# Altium PCB Lite Carrier for Mu.PcbDoc (part 2 of 15)
Units mm, origin at the board's own origin, x right, y up, seen from the top; angles counter-clockwise.
Board outline 146 x 102 mm, 20 copper layers (F.Cu, F.Mask, B.Cu, B.Mask, In1.Cu, F.SilkS, In2.Cu, B.SilkS, F.Adhes, B.Adhes, F.Paste, B.Paste, Dwgs.User, Cmts.User, Eco1.User, Eco2.User, Edge.Cuts, Margin, B.CrtYd, F.CrtYd); 254 components, 382 nets, 1258 pads, 1020 vias.
Unrouted connection lines stored in the file: 113.
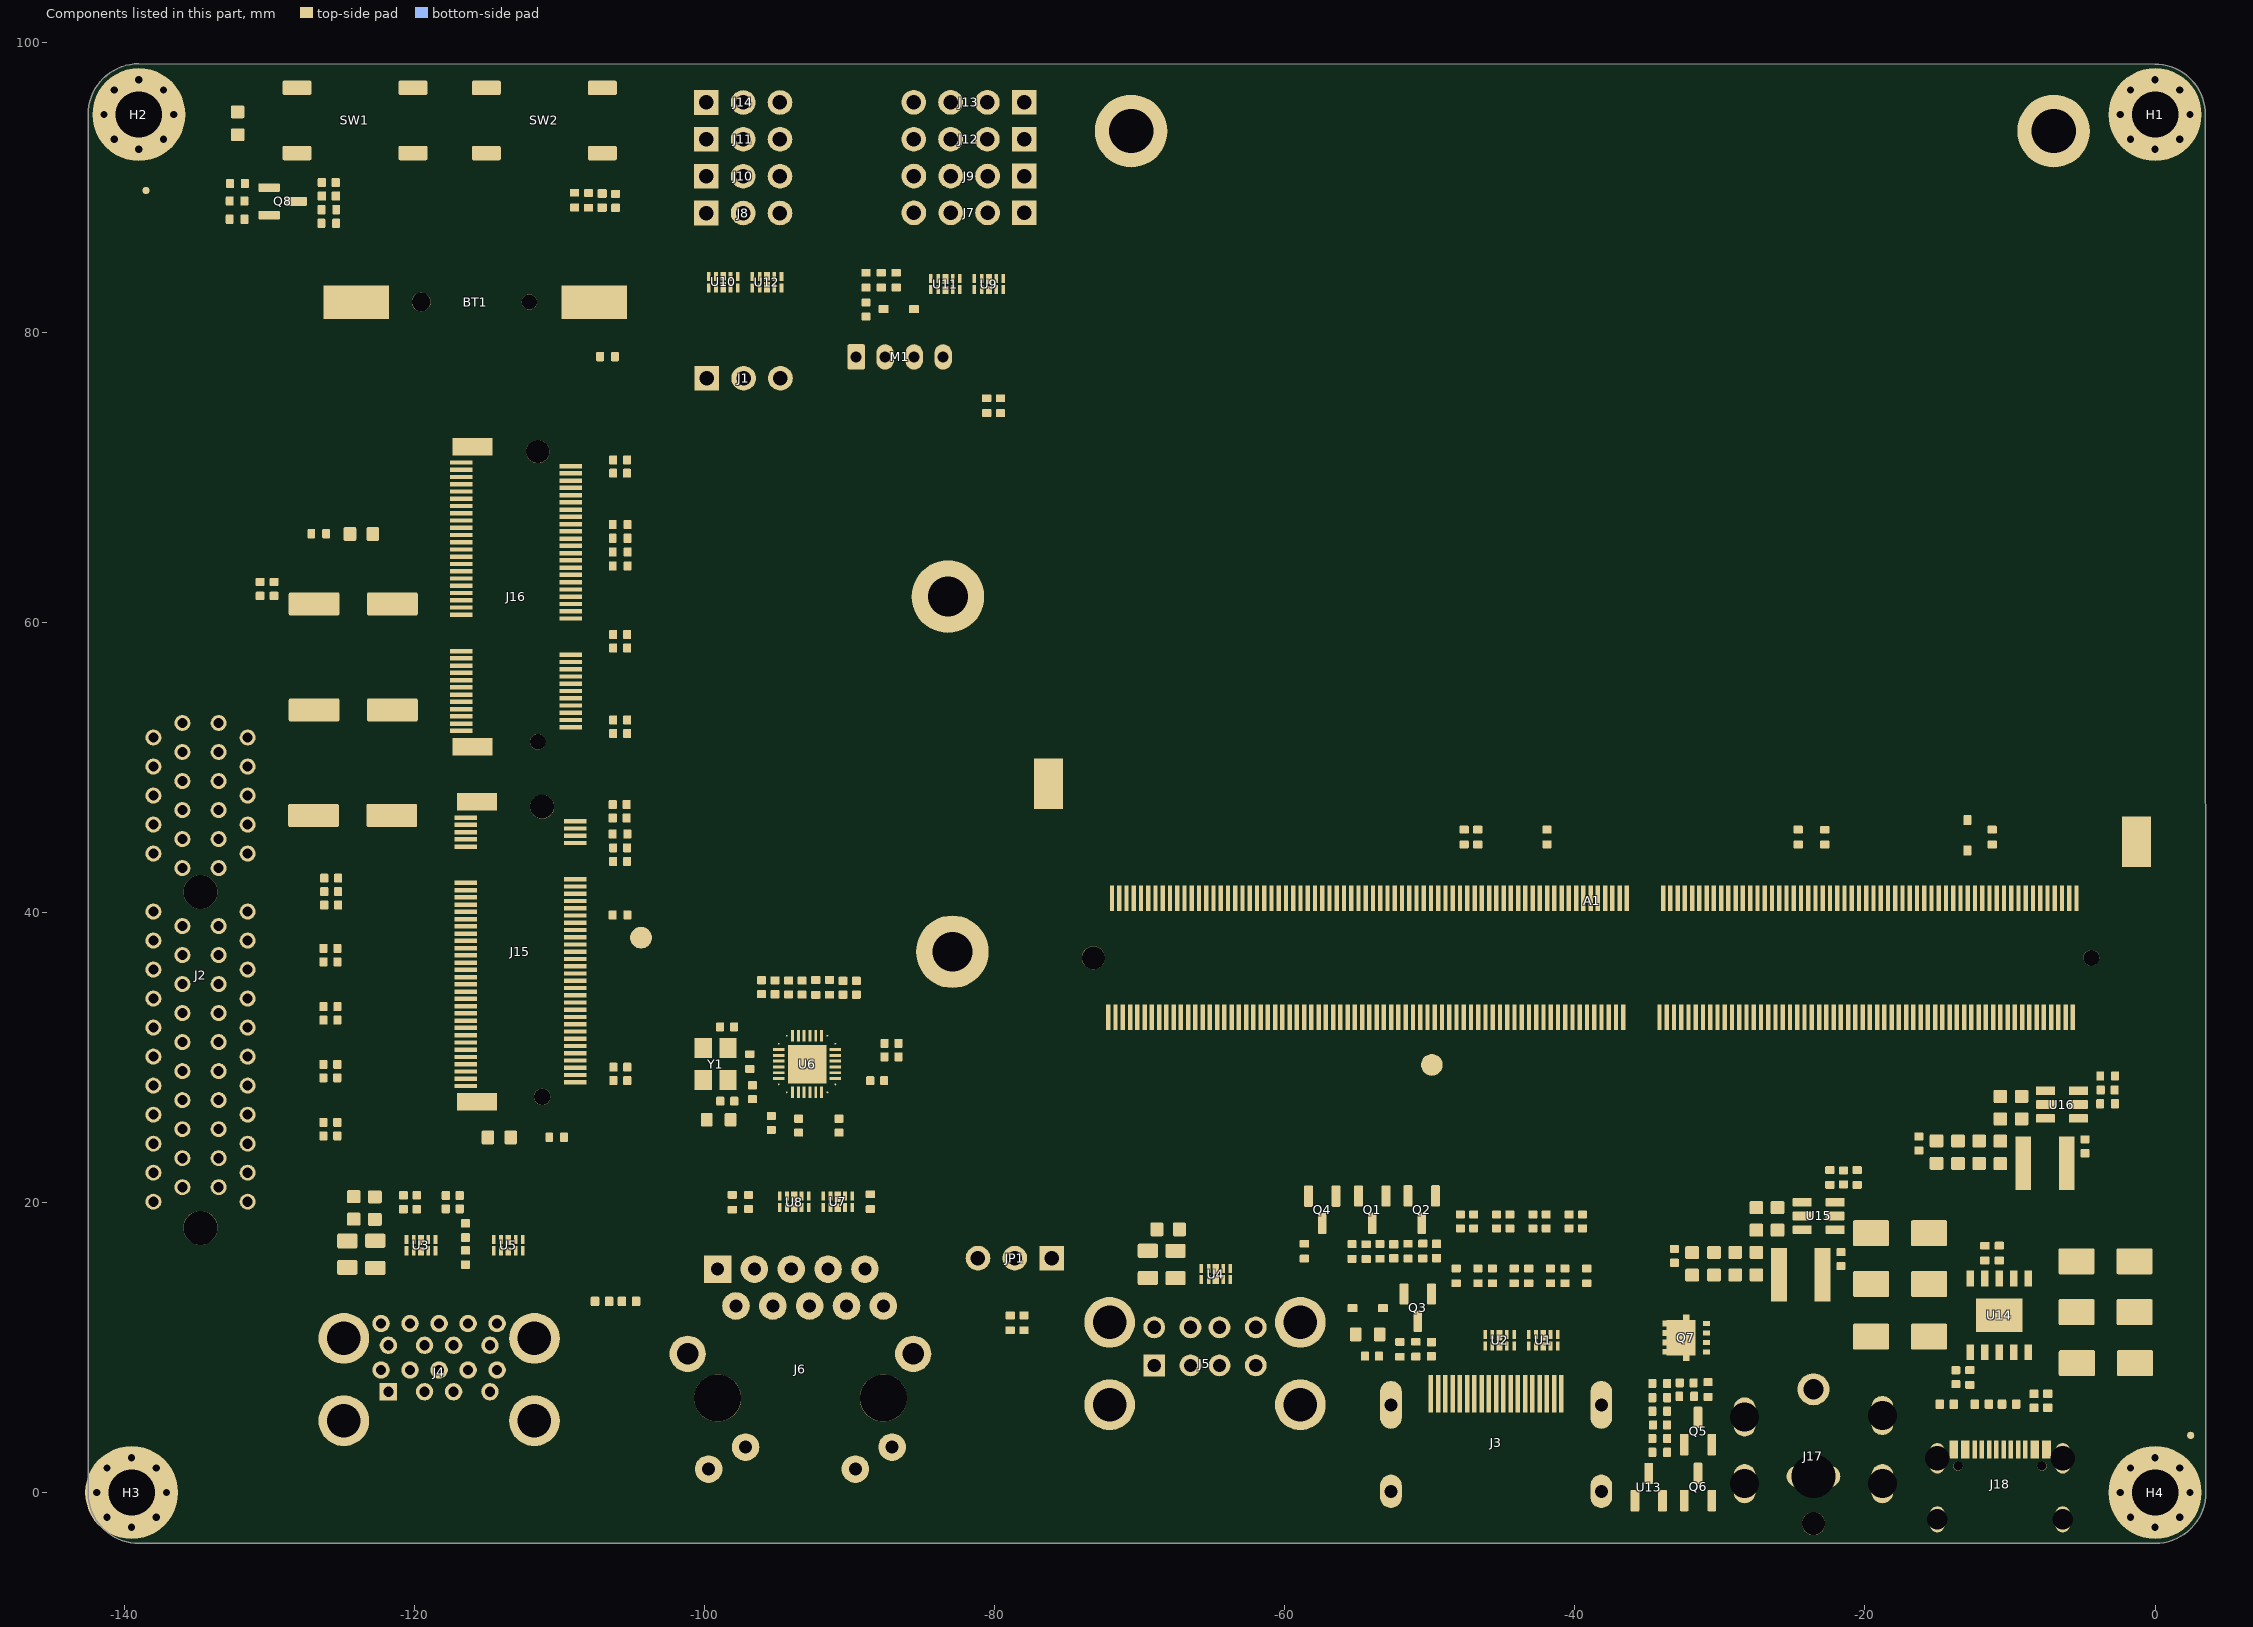
[diagram p13: the components of this part, seen from the top]

## Design rules (kind name [scope] priority, off if disabled: settings) (continued)
PolygonConnect Polygon_B.Cu-VDC_ConnectDirect [IsNamedPolygon('B.Cu-VDC')] p201: connectstyle=Direct reliefconductorwidth=0.254 reliefentries=4 polygonreliefangle="90 Angle" airgapwidth=0.254
PolygonConnect Polygon_B.Cu-+3V3-2_ConnectDirect [IsNamedPolygon('B.Cu-+3V3-2')] p202: connectstyle=Direct reliefconductorwidth=0.254 reliefentries=4 polygonreliefangle="90 Angle" airgapwidth=0.254
PolygonConnect Polygon_B.Cu-+3V3-1_ConnectDirect [IsNamedPolygon('B.Cu-+3V3-1')] p203: connectstyle=Direct reliefconductorwidth=0.254 reliefentries=4 polygonreliefangle="90 Angle" airgapwidth=0.254
PolygonConnect Polygon_B.Cu-/PSU/PWR_EN_ConnectDirect [IsNamedPolygon('B.Cu-/PSU/PWR_EN')] p204: connectstyle=Direct reliefconductorwidth=0.254 reliefentries=4 polygonreliefangle="90 Angle" airgapwidth=0.254
PolygonConnect "Polygon_B.Cu-/LattePanda Module/HSIO_10_RX+_ConnectDirect" [IsNamedPolygon('B.Cu-/LattePanda Module/HSIO_10_RX+')] p205: connectstyle=Direct reliefconductorwidth=0.254 reliefentries=4 polygonreliefangle="90 Angle" airgapwidth=0.254
PolygonConnect "Polygon_B.Cu-/LattePanda Module/HSIO_3_TX+-1_ConnectDirect" [IsNamedPolygon('B.Cu-/LattePanda Module/HSIO_3_TX+-1')] p206: connectstyle=Direct reliefconductorwidth=0.254 reliefentries=4 polygonreliefangle="90 Angle" airgapwidth=0.254
PolygonConnect "Polygon_B.Cu-/LattePanda Module/HSIO_3_TX+_ConnectDirect" [IsNamedPolygon('B.Cu-/LattePanda Module/HSIO_3_TX+')] p207: connectstyle=Direct reliefconductorwidth=0.254 reliefentries=4 polygonreliefangle="90 Angle" airgapwidth=0.254
PolygonConnect Polygon_B.Cu-/USB2.0&USB3.0/CON_USB3_SSRX_P_ConnectDirect [IsNamedPolygon('B.Cu-/USB2.0&USB3.0/CON_USB3_SSRX_P')] p208: connectstyle=Direct reliefconductorwidth=0.254 reliefentries=4 polygonreliefangle="90 Angle" airgapwidth=0.254
PolygonConnect Polygon_B.Cu-/~{WAKE}_ConnectDirect [IsNamedPolygon('B.Cu-/~{WAKE}')] p209: connectstyle=Direct reliefconductorwidth=0.254 reliefentries=4 polygonreliefangle="90 Angle" airgapwidth=0.254
PolygonConnect "Polygon_B.Cu-/LattePanda Module/REFCLK0-_ConnectDirect" [IsNamedPolygon('B.Cu-/LattePanda Module/REFCLK0-')] p210: connectstyle=Direct reliefconductorwidth=0.254 reliefentries=4 polygonreliefangle="90 Angle" airgapwidth=0.254
PolygonConnect "Polygon_B.Cu-/Gigabit Ethernet/GbE_PCIe_RX+-1_ConnectDirect" [IsNamedPolygon('B.Cu-/Gigabit Ethernet/GbE_PCIe_RX+-1')] p211: connectstyle=Direct reliefconductorwidth=0.254 reliefentries=4 polygonreliefangle="90 Angle" airgapwidth=0.254
PolygonConnect "Polygon_B.Cu-/LattePanda Module/HSIO_10_TX-_ConnectDirect" [IsNamedPolygon('B.Cu-/LattePanda Module/HSIO_10_TX-')] p212: connectstyle=Direct reliefconductorwidth=0.254 reliefentries=4 polygonreliefangle="90 Angle" airgapwidth=0.254
PolygonConnect "Polygon_B.Cu-/LattePanda Module/HSIO_8_TX--1_ConnectDirect" [IsNamedPolygon('B.Cu-/LattePanda Module/HSIO_8_TX--1')] p213: connectstyle=Direct reliefconductorwidth=0.254 reliefentries=4 polygonreliefangle="90 Angle" airgapwidth=0.254
PolygonConnect Polygon_B.Cu-/USB2.0&USB3.0/CON_USB3_SSTX_P_ConnectDirect [IsNamedPolygon('B.Cu-/USB2.0&USB3.0/CON_USB3_SSTX_P')] p214: connectstyle=Direct reliefconductorwidth=0.254 reliefentries=4 polygonreliefangle="90 Angle" airgapwidth=0.254
PolygonConnect "Polygon_B.Cu-/LattePanda Module/HSIO_8_TX+_ConnectDirect" [IsNamedPolygon('B.Cu-/LattePanda Module/HSIO_8_TX+')] p215: connectstyle=Direct reliefconductorwidth=0.254 reliefentries=4 polygonreliefangle="90 Angle" airgapwidth=0.254
PolygonConnect "Polygon_B.Cu-/LattePanda Module/HSIO_8_RX+_ConnectDirect" [IsNamedPolygon('B.Cu-/LattePanda Module/HSIO_8_RX+')] p216: connectstyle=Direct reliefconductorwidth=0.254 reliefentries=4 polygonreliefangle="90 Angle" airgapwidth=0.254
PolygonConnect "Polygon_B.Cu-/LattePanda Module/REFCLK2+_ConnectDirect" [IsNamedPolygon('B.Cu-/LattePanda Module/REFCLK2+')] p217: connectstyle=Direct reliefconductorwidth=0.254 reliefentries=4 polygonreliefangle="90 Angle" airgapwidth=0.254
PolygonConnect "Polygon_B.Cu-/LattePanda Module/HSIO_10_TX+-1_ConnectDirect" [IsNamedPolygon('B.Cu-/LattePanda Module/HSIO_10_TX+-1')] p218: connectstyle=Direct reliefconductorwidth=0.254 reliefentries=4 polygonreliefangle="90 Angle" airgapwidth=0.254
PolygonConnect "Polygon_B.Cu-/LattePanda Module/HSIO_2_RX-_ConnectDirect" [IsNamedPolygon('B.Cu-/LattePanda Module/HSIO_2_RX-')] p219: connectstyle=Direct reliefconductorwidth=0.254 reliefentries=4 polygonreliefangle="90 Angle" airgapwidth=0.254
PolygonConnect "Polygon_B.Cu-/LattePanda Module/HSIO_3_TX-_ConnectDirect" [IsNamedPolygon('B.Cu-/LattePanda Module/HSIO_3_TX-')] p220: connectstyle=Direct reliefconductorwidth=0.254 reliefentries=4 polygonreliefangle="90 Angle" airgapwidth=0.254
PolygonConnect "Polygon_B.Cu-/LattePanda Module/USB_2_P7-_ConnectDirect" [IsNamedPolygon('B.Cu-/LattePanda Module/USB_2_P7-')] p221: connectstyle=Direct reliefconductorwidth=0.254 reliefentries=4 polygonreliefangle="90 Angle" airgapwidth=0.254
PolygonConnect Polygon_B.Cu-/USB2.0&USB3.0/CON_USB3_D_P-1_ConnectDirect [IsNamedPolygon('B.Cu-/USB2.0&USB3.0/CON_USB3_D_P-1')] p222: connectstyle=Direct reliefconductorwidth=0.254 reliefentries=4 polygonreliefangle="90 Angle" airgapwidth=0.254
PolygonConnect Polygon_B.Cu-Net-(A1-~{BIOS_SEL})_ConnectDirect [IsNamedPolygon('B.Cu-Net-(A1-~{BIOS_SEL})')] p223: connectstyle=Direct reliefconductorwidth=0.254 reliefentries=4 polygonreliefangle="90 Angle" airgapwidth=0.254
PolygonConnect Polygon_B.Cu-Net-(A1-SIO_UART_RX)-1_ConnectDirect [IsNamedPolygon('B.Cu-Net-(A1-SIO_UART_RX)-1')] p224: connectstyle=Direct reliefconductorwidth=0.254 reliefentries=4 polygonreliefangle="90 Angle" airgapwidth=0.254
PolygonConnect "Polygon_B.Cu-/LattePanda Module/HSIO_9_RX-_ConnectDirect" [IsNamedPolygon('B.Cu-/LattePanda Module/HSIO_9_RX-')] p225: connectstyle=Direct reliefconductorwidth=0.254 reliefentries=4 polygonreliefangle="90 Angle" airgapwidth=0.254
PolygonConnect "Polygon_B.Cu-/LattePanda Module/HSIO_8_TX-_ConnectDirect" [IsNamedPolygon('B.Cu-/LattePanda Module/HSIO_8_TX-')] p226: connectstyle=Direct reliefconductorwidth=0.254 reliefentries=4 polygonreliefangle="90 Angle" airgapwidth=0.254
PolygonConnect Polygon_B.Cu-/GPIO/I2C2_SCL_ConnectDirect [IsNamedPolygon('B.Cu-/GPIO/I2C2_SCL')] p227: connectstyle=Direct reliefconductorwidth=0.254 reliefentries=4 polygonreliefangle="90 Angle" airgapwidth=0.254
PolygonConnect Polygon_B.Cu-+3V3_ConnectDirect [IsNamedPolygon('B.Cu-+3V3')] p228: connectstyle=Direct reliefconductorwidth=0.254 reliefentries=4 polygonreliefangle="90 Angle" airgapwidth=0.254
PolygonConnect Polygon_B.Cu-/USB2.0&USB3.0/CON_USB3_SSTX_N_ConnectDirect [IsNamedPolygon('B.Cu-/USB2.0&USB3.0/CON_USB3_SSTX_N')] p229: connectstyle=Direct reliefconductorwidth=0.254 reliefentries=4 polygonreliefangle="90 Angle" airgapwidth=0.254
PolygonConnect "Polygon_B.Cu-/LattePanda Module/HSIO_1_TX+_ConnectDirect" [IsNamedPolygon('B.Cu-/LattePanda Module/HSIO_1_TX+')] p230: connectstyle=Direct reliefconductorwidth=0.254 reliefentries=4 polygonreliefangle="90 Angle" airgapwidth=0.254
PolygonConnect Polygon_B.Cu-/USB2.0&USB3.0/CON_USB3_D_P_ConnectDirect [IsNamedPolygon('B.Cu-/USB2.0&USB3.0/CON_USB3_D_P')] p231: connectstyle=Direct reliefconductorwidth=0.254 reliefentries=4 polygonreliefangle="90 Angle" airgapwidth=0.254
PolygonConnect Polygon_B.Cu-/HDMI/DDI_B_DDC_SDA_ConnectDirect [IsNamedPolygon('B.Cu-/HDMI/DDI_B_DDC_SDA')] p232: connectstyle=Direct reliefconductorwidth=0.254 reliefentries=4 polygonreliefangle="90 Angle" airgapwidth=0.254
PolygonConnect Polygon_B.Cu-/PSU/PWR_C_D-_ConnectDirect [IsNamedPolygon('B.Cu-/PSU/PWR_C_D-')] p233: connectstyle=Direct reliefconductorwidth=0.254 reliefentries=4 polygonreliefangle="90 Angle" airgapwidth=0.254
PolygonConnect "Polygon_B.Cu-/LattePanda Module/HSIO_10_TX+_ConnectDirect" [IsNamedPolygon('B.Cu-/LattePanda Module/HSIO_10_TX+')] p234: connectstyle=Direct reliefconductorwidth=0.254 reliefentries=4 polygonreliefangle="90 Angle" airgapwidth=0.254
PolygonConnect "Polygon_B.Cu-/Gigabit Ethernet/GbE_PCIe_RX+_ConnectDirect" [IsNamedPolygon('B.Cu-/Gigabit Ethernet/GbE_PCIe_RX+')] p235: connectstyle=Direct reliefconductorwidth=0.254 reliefentries=4 polygonreliefangle="90 Angle" airgapwidth=0.254
PolygonConnect "Polygon_B.Cu-/LattePanda Module/HSIO_9_TX+_ConnectDirect" [IsNamedPolygon('B.Cu-/LattePanda Module/HSIO_9_TX+')] p236: connectstyle=Direct reliefconductorwidth=0.254 reliefentries=4 polygonreliefangle="90 Angle" airgapwidth=0.254
PolygonConnect Polygon_B.Cu-Net-(JP1-C)_ConnectDirect [IsNamedPolygon('B.Cu-Net-(JP1-C)')] p237: connectstyle=Direct reliefconductorwidth=0.254 reliefentries=4 polygonreliefangle="90 Angle" airgapwidth=0.254
PolygonConnect "Polygon_B.Cu-/LattePanda Module/HSIO_8_RX-_ConnectDirect" [IsNamedPolygon('B.Cu-/LattePanda Module/HSIO_8_RX-')] p238: connectstyle=Direct reliefconductorwidth=0.254 reliefentries=4 polygonreliefangle="90 Angle" airgapwidth=0.254
PolygonConnect "Polygon_B.Cu-/LattePanda Module/HSIO_3_RX-_ConnectDirect" [IsNamedPolygon('B.Cu-/LattePanda Module/HSIO_3_RX-')] p239: connectstyle=Direct reliefconductorwidth=0.254 reliefentries=4 polygonreliefangle="90 Angle" airgapwidth=0.254
PolygonConnect Polygon_B.Cu-Net-(A1-SIO_UART_RX)_ConnectDirect [IsNamedPolygon('B.Cu-Net-(A1-SIO_UART_RX)')] p240: connectstyle=Direct reliefconductorwidth=0.254 reliefentries=4 polygonreliefangle="90 Angle" airgapwidth=0.254
PolygonConnect Polygon_B.Cu-/USB2.0&USB3.0/CON_USB3_D_N_ConnectDirect [IsNamedPolygon('B.Cu-/USB2.0&USB3.0/CON_USB3_D_N')] p241: connectstyle=Direct reliefconductorwidth=0.254 reliefentries=4 polygonreliefangle="90 Angle" airgapwidth=0.254
PolygonConnect Polygon_B.Cu-/GPIO/I2C3_SCL_ConnectDirect [IsNamedPolygon('B.Cu-/GPIO/I2C3_SCL')] p242: connectstyle=Direct reliefconductorwidth=0.254 reliefentries=4 polygonreliefangle="90 Angle" airgapwidth=0.254
PolygonConnect "Polygon_B.Cu-/LattePanda Module/HSIO_0_TX+_ConnectDirect" [IsNamedPolygon('B.Cu-/LattePanda Module/HSIO_0_TX+')] p243: connectstyle=Direct reliefconductorwidth=0.254 reliefentries=4 polygonreliefangle="90 Angle" airgapwidth=0.254
PolygonConnect Polygon_B.Cu-/PSU/CC1_ConnectDirect [IsNamedPolygon('B.Cu-/PSU/CC1')] p244: connectstyle=Direct reliefconductorwidth=0.254 reliefentries=4 polygonreliefangle="90 Angle" airgapwidth=0.254
PolygonConnect Polygon_B.Cu-/PSU/CC2_ConnectDirect [IsNamedPolygon('B.Cu-/PSU/CC2')] p245: connectstyle=Direct reliefconductorwidth=0.254 reliefentries=4 polygonreliefangle="90 Angle" airgapwidth=0.254
PolygonConnect Polygon_B.Cu-Net-(A1-SIO_UART_TX)_ConnectDirect [IsNamedPolygon('B.Cu-Net-(A1-SIO_UART_TX)')] p246: connectstyle=Direct reliefconductorwidth=0.254 reliefentries=4 polygonreliefangle="90 Angle" airgapwidth=0.254
PolygonConnect "Polygon_B.Cu-/LattePanda Module/HSIO_2_TX+_ConnectDirect" [IsNamedPolygon('B.Cu-/LattePanda Module/HSIO_2_TX+')] p247: connectstyle=Direct reliefconductorwidth=0.254 reliefentries=4 polygonreliefangle="90 Angle" airgapwidth=0.254
PolygonConnect "Polygon_B.Cu-/LattePanda Module/HSIO_11_RX+_ConnectDirect" [IsNamedPolygon('B.Cu-/LattePanda Module/HSIO_11_RX+')] p248: connectstyle=Direct reliefconductorwidth=0.254 reliefentries=4 polygonreliefangle="90 Angle" airgapwidth=0.254
PolygonConnect Polygon_B.Cu-/Fan_Temp/FAN_1_PWM_ConnectDirect [IsNamedPolygon('B.Cu-/Fan_Temp/FAN_1_PWM')] p249: connectstyle=Direct reliefconductorwidth=0.254 reliefentries=4 polygonreliefangle="90 Angle" airgapwidth=0.254
PolygonConnect Polygon_In2.Cu-+3V3-1_ConnectDirect [IsNamedPolygon('In2.Cu-+3V3-1')] p250: connectstyle=Direct reliefconductorwidth=0.254 reliefentries=4 polygonreliefangle="90 Angle" airgapwidth=0.254
PolygonConnect Polygon_F.Cu-+3V3-79_ConnectDirect [IsNamedPolygon('F.Cu-+3V3-79')] p251: connectstyle=Direct reliefconductorwidth=0.254 reliefentries=4 polygonreliefangle="90 Angle" airgapwidth=0.254
PolygonConnect Polygon_In2.Cu-+3V3_ConnectDirect [IsNamedPolygon('In2.Cu-+3V3')] p252: connectstyle=Direct reliefconductorwidth=0.254 reliefentries=4 polygonreliefangle="90 Angle" airgapwidth=0.254
PolygonConnect Polygon_F.Cu-+3V3-78_ConnectDirect [IsNamedPolygon('F.Cu-+3V3-78')] p253: connectstyle=Direct reliefconductorwidth=0.254 reliefentries=4 polygonreliefangle="90 Angle" airgapwidth=0.254
PolygonConnect Polygon_B.Cu-+12VA_ConnectDirect [IsNamedPolygon('B.Cu-+12VA')] p254: connectstyle=Direct reliefconductorwidth=0.254 reliefentries=4 polygonreliefangle="90 Angle" airgapwidth=0.254
PolygonConnect Polygon_F.Cu-+12VA-2_ConnectDirect [IsNamedPolygon('F.Cu-+12VA-2')] p255: connectstyle=Direct reliefconductorwidth=0.254 reliefentries=4 polygonreliefangle="90 Angle" airgapwidth=0.254
PolygonConnect Polygon_B.Cu-GND-1_ConnectDirect [IsNamedPolygon('B.Cu-GND-1') vs IsVia or IsSMTPin] p256: connectstyle=Direct reliefconductorwidth=0.254 reliefentries=4 polygonreliefangle="90 Angle" airgapwidth=0.254
PolygonConnect Polygon_B.Cu-GND-1_ConnectRelief45 [IsNamedPolygon('B.Cu-GND-1') vs IsThruPin and (PadShape_AllLayers = 'Round')] p257: connectstyle=Relief reliefconductorwidth=0.3 reliefentries=4 polygonreliefangle="45 Angle" airgapwidth=0.3
PolygonConnect Polygon_B.Cu-GND-1_ConnectRelief90 [IsNamedPolygon('B.Cu-GND-1') vs IsThruPin and (PadShape_AllLayers <> 'Round')] p258: connectstyle=Relief reliefconductorwidth=0.3 reliefentries=4 polygonreliefangle="90 Angle" airgapwidth=0.3
PolygonConnect Polygon_F.Cu-GND-192_ConnectDirect [IsNamedPolygon('F.Cu-GND-192') vs IsVia or IsSMTPin] p259: connectstyle=Direct reliefconductorwidth=0.254 reliefentries=4 polygonreliefangle="90 Angle" airgapwidth=0.254
PolygonConnect Polygon_F.Cu-GND-192_ConnectRelief45 [IsNamedPolygon('F.Cu-GND-192') vs IsThruPin and (PadShape_AllLayers = 'Round')] p260: connectstyle=Relief reliefconductorwidth=0.3 reliefentries=4 polygonreliefangle="45 Angle" airgapwidth=0.3
PolygonConnect Polygon_F.Cu-GND-192_ConnectRelief90 [IsNamedPolygon('F.Cu-GND-192') vs IsThruPin and (PadShape_AllLayers <> 'Round')] p261: connectstyle=Relief reliefconductorwidth=0.3 reliefentries=4 polygonreliefangle="90 Angle" airgapwidth=0.3
PolygonConnect Polygon_B.Cu-+5V_ConnectDirect [IsNamedPolygon('B.Cu-+5V')] p262: connectstyle=Direct reliefconductorwidth=0.254 reliefentries=4 polygonreliefangle="90 Angle" airgapwidth=0.254
PolygonConnect Polygon_F.Cu-+5V-13_ConnectDirect [IsNamedPolygon('F.Cu-+5V-13')] p263: connectstyle=Direct reliefconductorwidth=0.254 reliefentries=4 polygonreliefangle="90 Angle" airgapwidth=0.254
PolygonConnect Polygon_B.Cu-GND_ConnectDirect [IsNamedPolygon('B.Cu-GND') vs IsVia or IsSMTPin] p264: connectstyle=Direct reliefconductorwidth=0.254 reliefentries=4 polygonreliefangle="90 Angle" airgapwidth=0.254
PolygonConnect Polygon_B.Cu-GND_ConnectRelief45 [IsNamedPolygon('B.Cu-GND') vs IsThruPin and (PadShape_AllLayers = 'Round')] p265: connectstyle=Relief reliefconductorwidth=0.5 reliefentries=4 polygonreliefangle="45 Angle" airgapwidth=0.5
PolygonConnect Polygon_B.Cu-GND_ConnectRelief90 [IsNamedPolygon('B.Cu-GND') vs IsThruPin and (PadShape_AllLayers <> 'Round')] p266: connectstyle=Relief reliefconductorwidth=0.5 reliefentries=4 polygonreliefangle="90 Angle" airgapwidth=0.5
PolygonConnect Polygon_F.Cu-GND-191_ConnectDirect [IsNamedPolygon('F.Cu-GND-191') vs IsVia or IsSMTPin] p267: connectstyle=Direct reliefconductorwidth=0.254 reliefentries=4 polygonreliefangle="90 Angle" airgapwidth=0.254
PolygonConnect Polygon_F.Cu-GND-191_ConnectRelief45 [IsNamedPolygon('F.Cu-GND-191') vs IsThruPin and (PadShape_AllLayers = 'Round')] p268: connectstyle=Relief reliefconductorwidth=0.5 reliefentries=4 polygonreliefangle="45 Angle" airgapwidth=0.5
PolygonConnect Polygon_F.Cu-GND-191_ConnectRelief90 [IsNamedPolygon('F.Cu-GND-191') vs IsThruPin and (PadShape_AllLayers <> 'Round')] p269: connectstyle=Relief reliefconductorwidth=0.5 reliefentries=4 polygonreliefangle="90 Angle" airgapwidth=0.5
PolygonConnect Polygon_F.Cu-+3V3-77_ConnectDirect [IsNamedPolygon('F.Cu-+3V3-77')] p270: connectstyle=Direct reliefconductorwidth=0.254 reliefentries=4 polygonreliefangle="90 Angle" airgapwidth=0.254
PolygonConnect Polygon_F.Cu-Net-(JP1-C)-1_ConnectDirect [IsNamedPolygon('F.Cu-Net-(JP1-C)-1')] p271: connectstyle=Direct reliefconductorwidth=0.254 reliefentries=4 polygonreliefangle="90 Angle" airgapwidth=0.254
PolygonConnect Polygon_F.Cu-+3V3-76_ConnectDirect [IsNamedPolygon('F.Cu-+3V3-76')] p272: connectstyle=Direct reliefconductorwidth=0.254 reliefentries=4 polygonreliefangle="90 Angle" airgapwidth=0.254
PolygonConnect Polygon_F.Cu-Net-(Q7-G)-7_ConnectDirect [IsNamedPolygon('F.Cu-Net-(Q7-G)-7')] p273: connectstyle=Direct reliefconductorwidth=0.254 reliefentries=4 polygonreliefangle="90 Angle" airgapwidth=0.254
PolygonConnect Polygon_F.Cu-/HDMI/DDI_B_TX1-_ConnectDirect [IsNamedPolygon('F.Cu-/HDMI/DDI_B_TX1-')] p274: connectstyle=Direct reliefconductorwidth=0.254 reliefentries=4 polygonreliefangle="90 Angle" airgapwidth=0.254
PolygonConnect Polygon_F.Cu-/HDMI/TMDS_CK--7_ConnectDirect [IsNamedPolygon('F.Cu-/HDMI/TMDS_CK--7')] p275: connectstyle=Direct reliefconductorwidth=0.254 reliefentries=4 polygonreliefangle="90 Angle" airgapwidth=0.254
PolygonConnect Polygon_F.Cu-Net-(U15-FB)-2_ConnectDirect [IsNamedPolygon('F.Cu-Net-(U15-FB)-2')] p276: connectstyle=Direct reliefconductorwidth=0.254 reliefentries=4 polygonreliefangle="90 Angle" airgapwidth=0.254
PolygonConnect Polygon_F.Cu-+15V-5_ConnectDirect [IsNamedPolygon('F.Cu-+15V-5')] p277: connectstyle=Direct reliefconductorwidth=0.254 reliefentries=4 polygonreliefangle="90 Angle" airgapwidth=0.254
PolygonConnect Polygon_F.Cu-Net-(Q8-G)-3_ConnectDirect [IsNamedPolygon('F.Cu-Net-(Q8-G)-3')] p278: connectstyle=Direct reliefconductorwidth=0.254 reliefentries=4 polygonreliefangle="90 Angle" airgapwidth=0.254
PolygonConnect Polygon_F.Cu-Net-(A1-~{BIOS_SEL})-2_ConnectDirect [IsNamedPolygon('F.Cu-Net-(A1-~{BIOS_SEL})-2')] p279: connectstyle=Direct reliefconductorwidth=0.254 reliefentries=4 polygonreliefangle="90 Angle" airgapwidth=0.254
PolygonConnect "Polygon_F.Cu-/LattePanda Module/SLS_S3_ConnectDirect" [IsNamedPolygon('F.Cu-/LattePanda Module/SLS_S3')] p280: connectstyle=Direct reliefconductorwidth=0.254 reliefentries=4 polygonreliefangle="90 Angle" airgapwidth=0.254
PolygonConnect Polygon_F.Cu-GND-190_ConnectDirect [IsNamedPolygon('F.Cu-GND-190')] p281: connectstyle=Direct reliefconductorwidth=0.254 reliefentries=4 polygonreliefangle="90 Angle" airgapwidth=0.254
PolygonConnect Polygon_F.Cu-/USB2.0&USB3.0/CON_USB3_SSTX_N-5_ConnectDirect [IsNamedPolygon('F.Cu-/USB2.0&USB3.0/CON_USB3_SSTX_N-5')] p282: connectstyle=Direct reliefconductorwidth=0.254 reliefentries=4 polygonreliefangle="90 Angle" airgapwidth=0.254
PolygonConnect Polygon_F.Cu-VPullup-7_ConnectDirect [IsNamedPolygon('F.Cu-VPullup-7')] p283: connectstyle=Direct reliefconductorwidth=0.254 reliefentries=4 polygonreliefangle="90 Angle" airgapwidth=0.254
PolygonConnect Polygon_F.Cu-Net-(D22-K)-1_ConnectDirect [IsNamedPolygon('F.Cu-Net-(D22-K)-1')] p284: connectstyle=Direct reliefconductorwidth=0.254 reliefentries=4 polygonreliefangle="90 Angle" airgapwidth=0.254
PolygonConnect Polygon_F.Cu-/GPIO/SOC_UART1_RX-4_ConnectDirect [IsNamedPolygon('F.Cu-/GPIO/SOC_UART1_RX-4')] p285: connectstyle=Direct reliefconductorwidth=0.254 reliefentries=4 polygonreliefangle="90 Angle" airgapwidth=0.254
PolygonConnect Polygon_F.Cu-GND-189_ConnectDirect [IsNamedPolygon('F.Cu-GND-189')] p286: connectstyle=Direct reliefconductorwidth=0.254 reliefentries=4 polygonreliefangle="90 Angle" airgapwidth=0.254
PolygonConnect Polygon_F.Cu-+1V0-16_ConnectDirect [IsNamedPolygon('F.Cu-+1V0-16')] p287: connectstyle=Direct reliefconductorwidth=0.254 reliefentries=4 polygonreliefangle="90 Angle" airgapwidth=0.254
PolygonConnect Polygon_F.Cu-/USB2.0&USB3.0/CON_USB3_D_P-4_ConnectDirect [IsNamedPolygon('F.Cu-/USB2.0&USB3.0/CON_USB3_D_P-4')] p288: connectstyle=Direct reliefconductorwidth=0.254 reliefentries=4 polygonreliefangle="90 Angle" airgapwidth=0.254
PolygonConnect Polygon_F.Cu-GND-188_ConnectDirect [IsNamedPolygon('F.Cu-GND-188')] p289: connectstyle=Direct reliefconductorwidth=0.254 reliefentries=4 polygonreliefangle="90 Angle" airgapwidth=0.254
PolygonConnect Polygon_F.Cu-/USB2.0&USB3.0/CON_USB2_D_N-4_ConnectDirect [IsNamedPolygon('F.Cu-/USB2.0&USB3.0/CON_USB2_D_N-4')] p290: connectstyle=Direct reliefconductorwidth=0.254 reliefentries=4 polygonreliefangle="90 Angle" airgapwidth=0.254
PolygonConnect Polygon_F.Cu-/USB2.0&USB3.0/CON_USB3_SSTX_N-4_ConnectDirect [IsNamedPolygon('F.Cu-/USB2.0&USB3.0/CON_USB3_SSTX_N-4')] p291: connectstyle=Direct reliefconductorwidth=0.254 reliefentries=4 polygonreliefangle="90 Angle" airgapwidth=0.254
PolygonConnect Polygon_F.Cu-/GPIO/SOC_UART0_RX-4_ConnectDirect [IsNamedPolygon('F.Cu-/GPIO/SOC_UART0_RX-4')] p292: connectstyle=Direct reliefconductorwidth=0.254 reliefentries=4 polygonreliefangle="90 Angle" airgapwidth=0.254
PolygonConnect Polygon_F.Cu-GND-187_ConnectDirect [IsNamedPolygon('F.Cu-GND-187')] p293: connectstyle=Direct reliefconductorwidth=0.254 reliefentries=4 polygonreliefangle="90 Angle" airgapwidth=0.254
PolygonConnect Polygon_F.Cu-Net-(D21-A2)-4_ConnectDirect [IsNamedPolygon('F.Cu-Net-(D21-A2)-4')] p294: connectstyle=Direct reliefconductorwidth=0.254 reliefentries=4 polygonreliefangle="90 Angle" airgapwidth=0.254
PolygonConnect "Polygon_F.Cu-/Gigabit Ethernet/MDI2--1_ConnectDirect" [IsNamedPolygon('F.Cu-/Gigabit Ethernet/MDI2--1')] p295: connectstyle=Direct reliefconductorwidth=0.254 reliefentries=4 polygonreliefangle="90 Angle" airgapwidth=0.254
PolygonConnect Polygon_F.Cu-/USB2.0&USB3.0/CON_USB4_SSRX_N-4_ConnectDirect [IsNamedPolygon('F.Cu-/USB2.0&USB3.0/CON_USB4_SSRX_N-4')] p296: connectstyle=Direct reliefconductorwidth=0.254 reliefentries=4 polygonreliefangle="90 Angle" airgapwidth=0.254
PolygonConnect Polygon_F.Cu-GND-186_ConnectDirect [IsNamedPolygon('F.Cu-GND-186')] p297: connectstyle=Direct reliefconductorwidth=0.254 reliefentries=4 polygonreliefangle="90 Angle" airgapwidth=0.254
PolygonConnect Polygon_F.Cu-Net-(Q5-D)-1_ConnectDirect [IsNamedPolygon('F.Cu-Net-(Q5-D)-1')] p298: connectstyle=Direct reliefconductorwidth=0.254 reliefentries=4 polygonreliefangle="90 Angle" airgapwidth=0.254
PolygonConnect Polygon_F.Cu-/USB2.0&USB3.0/CON_USB1_D_P-4_ConnectDirect [IsNamedPolygon('F.Cu-/USB2.0&USB3.0/CON_USB1_D_P-4')] p299: connectstyle=Direct reliefconductorwidth=0.254 reliefentries=4 polygonreliefangle="90 Angle" airgapwidth=0.254
PolygonConnect Polygon_F.Cu-Net-(J3-+5V)-1_ConnectDirect [IsNamedPolygon('F.Cu-Net-(J3-+5V)-1')] p300: connectstyle=Direct reliefconductorwidth=0.254 reliefentries=4 polygonreliefangle="90 Angle" airgapwidth=0.254
PolygonConnect "Polygon_F.Cu-/LattePanda Module/HSIO_8_TX--2_ConnectDirect" [IsNamedPolygon('F.Cu-/LattePanda Module/HSIO_8_TX--2')] p301: connectstyle=Direct reliefconductorwidth=0.254 reliefentries=4 polygonreliefangle="90 Angle" airgapwidth=0.254
PolygonConnect Polygon_F.Cu-/GPIO/I2C3_SDA-2_ConnectDirect [IsNamedPolygon('F.Cu-/GPIO/I2C3_SDA-2')] p302: connectstyle=Direct reliefconductorwidth=0.254 reliefentries=4 polygonreliefangle="90 Angle" airgapwidth=0.254
PolygonConnect Polygon_F.Cu-+3V3-75_ConnectDirect [IsNamedPolygon('F.Cu-+3V3-75')] p303: connectstyle=Direct reliefconductorwidth=0.254 reliefentries=4 polygonreliefangle="90 Angle" airgapwidth=0.254
PolygonConnect Polygon_F.Cu-+12V-10_ConnectDirect [IsNamedPolygon('F.Cu-+12V-10')] p304: connectstyle=Direct reliefconductorwidth=0.254 reliefentries=4 polygonreliefangle="90 Angle" airgapwidth=0.254
PolygonConnect Polygon_F.Cu-Net-(J3-+5V)_ConnectDirect [IsNamedPolygon('F.Cu-Net-(J3-+5V)')] p305: connectstyle=Direct reliefconductorwidth=0.254 reliefentries=4 polygonreliefangle="90 Angle" airgapwidth=0.254
PolygonConnect Polygon_F.Cu-GND-185_ConnectDirect [IsNamedPolygon('F.Cu-GND-185')] p306: connectstyle=Direct reliefconductorwidth=0.254 reliefentries=4 polygonreliefangle="90 Angle" airgapwidth=0.254
PolygonConnect "Polygon_F.Cu-/LattePanda Module/HSIO_3_TX--2_ConnectDirect" [IsNamedPolygon('F.Cu-/LattePanda Module/HSIO_3_TX--2')] p307: connectstyle=Direct reliefconductorwidth=0.254 reliefentries=4 polygonreliefangle="90 Angle" airgapwidth=0.254
PolygonConnect Polygon_F.Cu-/USB2.0&USB3.0/CON_USB3_SSRX_P-4_ConnectDirect [IsNamedPolygon('F.Cu-/USB2.0&USB3.0/CON_USB3_SSRX_P-4')] p308: connectstyle=Direct reliefconductorwidth=0.254 reliefentries=4 polygonreliefangle="90 Angle" airgapwidth=0.254
PolygonConnect Polygon_F.Cu-/GPIO/SOC_UART2_RX-4_ConnectDirect [IsNamedPolygon('F.Cu-/GPIO/SOC_UART2_RX-4')] p309: connectstyle=Direct reliefconductorwidth=0.254 reliefentries=4 polygonreliefangle="90 Angle" airgapwidth=0.254
PolygonConnect "Polygon_F.Cu-/LattePanda Module/REFCLK2+-2_ConnectDirect" [IsNamedPolygon('F.Cu-/LattePanda Module/REFCLK2+-2')] p310: connectstyle=Direct reliefconductorwidth=0.254 reliefentries=4 polygonreliefangle="90 Angle" airgapwidth=0.254
PolygonConnect Polygon_F.Cu-Net-(U14-VDD)-3_ConnectDirect [IsNamedPolygon('F.Cu-Net-(U14-VDD)-3')] p311: connectstyle=Direct reliefconductorwidth=0.254 reliefentries=4 polygonreliefangle="90 Angle" airgapwidth=0.254
PolygonConnect Polygon_F.Cu-Net-(D23-A)_ConnectDirect [IsNamedPolygon('F.Cu-Net-(D23-A)')] p312: connectstyle=Direct reliefconductorwidth=0.254 reliefentries=4 polygonreliefangle="90 Angle" airgapwidth=0.254
PolygonConnect "Polygon_F.Cu-/LattePanda Module/HSIO_1_TX--2_ConnectDirect" [IsNamedPolygon('F.Cu-/LattePanda Module/HSIO_1_TX--2')] p313: connectstyle=Direct reliefconductorwidth=0.254 reliefentries=4 polygonreliefangle="90 Angle" airgapwidth=0.254
PolygonConnect Polygon_F.Cu-+3V3-74_ConnectDirect [IsNamedPolygon('F.Cu-+3V3-74')] p314: connectstyle=Direct reliefconductorwidth=0.254 reliefentries=4 polygonreliefangle="90 Angle" airgapwidth=0.254
PolygonConnect Polygon_F.Cu-GND-184_ConnectDirect [IsNamedPolygon('F.Cu-GND-184')] p315: connectstyle=Direct reliefconductorwidth=0.254 reliefentries=4 polygonreliefangle="90 Angle" airgapwidth=0.254
PolygonConnect Polygon_F.Cu-GND-183_ConnectDirect [IsNamedPolygon('F.Cu-GND-183')] p316: connectstyle=Direct reliefconductorwidth=0.254 reliefentries=4 polygonreliefangle="90 Angle" airgapwidth=0.254
PolygonConnect "Polygon_F.Cu-/LattePanda Module/HSIO_11_TX+-1_ConnectDirect" [IsNamedPolygon('F.Cu-/LattePanda Module/HSIO_11_TX+-1')] p317: connectstyle=Direct reliefconductorwidth=0.254 reliefentries=4 polygonreliefangle="90 Angle" airgapwidth=0.254
PolygonConnect Polygon_F.Cu-/USB2.0&USB3.0/CON_USB4_SSTX_P-5_ConnectDirect [IsNamedPolygon('F.Cu-/USB2.0&USB3.0/CON_USB4_SSTX_P-5')] p318: connectstyle=Direct reliefconductorwidth=0.254 reliefentries=4 polygonreliefangle="90 Angle" airgapwidth=0.254
PolygonConnect Polygon_F.Cu-/HDMI/TMDS_D1--7_ConnectDirect [IsNamedPolygon('F.Cu-/HDMI/TMDS_D1--7')] p319: connectstyle=Direct reliefconductorwidth=0.254 reliefentries=4 polygonreliefangle="90 Angle" airgapwidth=0.254
PolygonConnect Polygon_F.Cu-GND-182_ConnectDirect [IsNamedPolygon('F.Cu-GND-182')] p320: connectstyle=Direct reliefconductorwidth=0.254 reliefentries=4 polygonreliefangle="90 Angle" airgapwidth=0.254
PolygonConnect Polygon_F.Cu-/HDMI/TMDS_D0+-7_ConnectDirect [IsNamedPolygon('F.Cu-/HDMI/TMDS_D0+-7')] p321: connectstyle=Direct reliefconductorwidth=0.254 reliefentries=4 polygonreliefangle="90 Angle" airgapwidth=0.254
PolygonConnect Polygon_F.Cu-GND-181_ConnectDirect [IsNamedPolygon('F.Cu-GND-181')] p322: connectstyle=Direct reliefconductorwidth=0.254 reliefentries=4 polygonreliefangle="90 Angle" airgapwidth=0.254
PolygonConnect Polygon_F.Cu-Net-(A1-~{BIOS_SEL})-1_ConnectDirect [IsNamedPolygon('F.Cu-Net-(A1-~{BIOS_SEL})-1')] p323: connectstyle=Direct reliefconductorwidth=0.254 reliefentries=4 polygonreliefangle="90 Angle" airgapwidth=0.254
PolygonConnect Polygon_F.Cu-+3V3-73_ConnectDirect [IsNamedPolygon('F.Cu-+3V3-73')] p324: connectstyle=Direct reliefconductorwidth=0.254 reliefentries=4 polygonreliefangle="90 Angle" airgapwidth=0.254
PolygonConnect Polygon_F.Cu-/GPIO/I2C4_SDA-2_ConnectDirect [IsNamedPolygon('F.Cu-/GPIO/I2C4_SDA-2')] p325: connectstyle=Direct reliefconductorwidth=0.254 reliefentries=4 polygonreliefangle="90 Angle" airgapwidth=0.254
PolygonConnect Polygon_F.Cu-GND-180_ConnectDirect [IsNamedPolygon('F.Cu-GND-180')] p326: connectstyle=Direct reliefconductorwidth=0.254 reliefentries=4 polygonreliefangle="90 Angle" airgapwidth=0.254
PolygonConnect Polygon_F.Cu-+1V0-15_ConnectDirect [IsNamedPolygon('F.Cu-+1V0-15')] p327: connectstyle=Direct reliefconductorwidth=0.254 reliefentries=4 polygonreliefangle="90 Angle" airgapwidth=0.254
PolygonConnect Polygon_F.Cu-GND-179_ConnectDirect [IsNamedPolygon('F.Cu-GND-179')] p328: connectstyle=Direct reliefconductorwidth=0.254 reliefentries=4 polygonreliefangle="90 Angle" airgapwidth=0.254
PolygonConnect "Polygon_F.Cu-/Gigabit Ethernet/GbE_PCIe_RX--2_ConnectDirect" [IsNamedPolygon('F.Cu-/Gigabit Ethernet/GbE_PCIe_RX--2')] p329: connectstyle=Direct reliefconductorwidth=0.254 reliefentries=4 polygonreliefangle="90 Angle" airgapwidth=0.254
PolygonConnect Polygon_F.Cu-/HDMI/TMDS_D0--7_ConnectDirect [IsNamedPolygon('F.Cu-/HDMI/TMDS_D0--7')] p330: connectstyle=Direct reliefconductorwidth=0.254 reliefentries=4 polygonreliefangle="90 Angle" airgapwidth=0.254
PolygonConnect Polygon_F.Cu-GND-178_ConnectDirect [IsNamedPolygon('F.Cu-GND-178')] p331: connectstyle=Direct reliefconductorwidth=0.254 reliefentries=4 polygonreliefangle="90 Angle" airgapwidth=0.254
PolygonConnect Polygon_F.Cu-/HDMI/DDI_B_TX2-_ConnectDirect [IsNamedPolygon('F.Cu-/HDMI/DDI_B_TX2-')] p332: connectstyle=Direct reliefconductorwidth=0.254 reliefentries=4 polygonreliefangle="90 Angle" airgapwidth=0.254
PolygonConnect "Polygon_F.Cu-/PCIe x4/PCIE30_TX3_N-1_ConnectDirect" [IsNamedPolygon('F.Cu-/PCIe x4/PCIE30_TX3_N-1')] p333: connectstyle=Direct reliefconductorwidth=0.254 reliefentries=4 polygonreliefangle="90 Angle" airgapwidth=0.254
PolygonConnect Polygon_F.Cu-/HDMI/DDI_B_DDC_SDA-3_ConnectDirect [IsNamedPolygon('F.Cu-/HDMI/DDI_B_DDC_SDA-3')] p334: connectstyle=Direct reliefconductorwidth=0.254 reliefentries=4 polygonreliefangle="90 Angle" airgapwidth=0.254
PolygonConnect "Polygon_F.Cu-/LattePanda Module/HSIO_11_RX+_ConnectDirect" [IsNamedPolygon('F.Cu-/LattePanda Module/HSIO_11_RX+')] p335: connectstyle=Direct reliefconductorwidth=0.254 reliefentries=4 polygonreliefangle="90 Angle" airgapwidth=0.254
PolygonConnect Polygon_F.Cu-Net-(U6-CKXTAL1)-5_ConnectDirect [IsNamedPolygon('F.Cu-Net-(U6-CKXTAL1)-5')] p336: connectstyle=Direct reliefconductorwidth=0.254 reliefentries=4 polygonreliefangle="90 Angle" airgapwidth=0.254
PolygonConnect Polygon_F.Cu-/USB2.0&USB3.0/CON_USB4_SSTX_N-5_ConnectDirect [IsNamedPolygon('F.Cu-/USB2.0&USB3.0/CON_USB4_SSTX_N-5')] p337: connectstyle=Direct reliefconductorwidth=0.254 reliefentries=4 polygonreliefangle="90 Angle" airgapwidth=0.254
PolygonConnect Polygon_F.Cu-+3V3-72_ConnectDirect [IsNamedPolygon('F.Cu-+3V3-72')] p338: connectstyle=Direct reliefconductorwidth=0.254 reliefentries=4 polygonreliefangle="90 Angle" airgapwidth=0.254
PolygonConnect Polygon_F.Cu-+1V0-14_ConnectDirect [IsNamedPolygon('F.Cu-+1V0-14')] p339: connectstyle=Direct reliefconductorwidth=0.254 reliefentries=4 polygonreliefangle="90 Angle" airgapwidth=0.254
PolygonConnect Polygon_F.Cu-GND-177_ConnectDirect [IsNamedPolygon('F.Cu-GND-177')] p340: connectstyle=Direct reliefconductorwidth=0.254 reliefentries=4 polygonreliefangle="90 Angle" airgapwidth=0.254
PolygonConnect Polygon_F.Cu-Net-(Q5-D)_ConnectDirect [IsNamedPolygon('F.Cu-Net-(Q5-D)')] p341: connectstyle=Direct reliefconductorwidth=0.254 reliefentries=4 polygonreliefangle="90 Angle" airgapwidth=0.254
PolygonConnect Polygon_F.Cu-/Fan_Temp/FAN_1_PWM-2_ConnectDirect [IsNamedPolygon('F.Cu-/Fan_Temp/FAN_1_PWM-2')] p342: connectstyle=Direct reliefconductorwidth=0.254 reliefentries=4 polygonreliefangle="90 Angle" airgapwidth=0.254
PolygonConnect "Polygon_F.Cu-/LattePanda Module/HSIO_2_RX+-2_ConnectDirect" [IsNamedPolygon('F.Cu-/LattePanda Module/HSIO_2_RX+-2')] p343: connectstyle=Direct reliefconductorwidth=0.254 reliefentries=4 polygonreliefangle="90 Angle" airgapwidth=0.254
PolygonConnect Polygon_F.Cu-GND-176_ConnectDirect [IsNamedPolygon('F.Cu-GND-176')] p344: connectstyle=Direct reliefconductorwidth=0.254 reliefentries=4 polygonreliefangle="90 Angle" airgapwidth=0.254
PolygonConnect Polygon_F.Cu-GND-175_ConnectDirect [IsNamedPolygon('F.Cu-GND-175')] p345: connectstyle=Direct reliefconductorwidth=0.254 reliefentries=4 polygonreliefangle="90 Angle" airgapwidth=0.254
PolygonConnect Polygon_F.Cu-+3V3-71_ConnectDirect [IsNamedPolygon('F.Cu-+3V3-71')] p346: connectstyle=Direct reliefconductorwidth=0.254 reliefentries=4 polygonreliefangle="90 Angle" airgapwidth=0.254
PolygonConnect Polygon_F.Cu-GND-174_ConnectDirect [IsNamedPolygon('F.Cu-GND-174')] p347: connectstyle=Direct reliefconductorwidth=0.254 reliefentries=4 polygonreliefangle="90 Angle" airgapwidth=0.254
PolygonConnect Polygon_F.Cu-/PSU/PWR_EN-9_ConnectDirect [IsNamedPolygon('F.Cu-/PSU/PWR_EN-9')] p348: connectstyle=Direct reliefconductorwidth=0.254 reliefentries=4 polygonreliefangle="90 Angle" airgapwidth=0.254
PolygonConnect "Polygon_F.Cu-/M.2 E&M Key/~{CLKREQE}-3_ConnectDirect" [IsNamedPolygon('F.Cu-/M.2 E&M Key/~{CLKREQE}-3')] p349: connectstyle=Direct reliefconductorwidth=0.254 reliefentries=4 polygonreliefangle="90 Angle" airgapwidth=0.254
PolygonConnect Polygon_F.Cu-/USB2.0&USB3.0/CON_USB2_D_P-4_ConnectDirect [IsNamedPolygon('F.Cu-/USB2.0&USB3.0/CON_USB2_D_P-4')] p350: connectstyle=Direct reliefconductorwidth=0.254 reliefentries=4 polygonreliefangle="90 Angle" airgapwidth=0.254
PolygonConnect Polygon_F.Cu-Net-(J5-VBUS1)-1_ConnectDirect [IsNamedPolygon('F.Cu-Net-(J5-VBUS1)-1')] p351: connectstyle=Direct reliefconductorwidth=0.254 reliefentries=4 polygonreliefangle="90 Angle" airgapwidth=0.254
PolygonConnect Polygon_F.Cu-Net-(U6-LANWAKEB)-1_ConnectDirect [IsNamedPolygon('F.Cu-Net-(U6-LANWAKEB)-1')] p352: connectstyle=Direct reliefconductorwidth=0.254 reliefentries=4 polygonreliefangle="90 Angle" airgapwidth=0.254
PolygonConnect Polygon_F.Cu-+1V0-13_ConnectDirect [IsNamedPolygon('F.Cu-+1V0-13')] p353: connectstyle=Direct reliefconductorwidth=0.254 reliefentries=4 polygonreliefangle="90 Angle" airgapwidth=0.254
PolygonConnect "Polygon_F.Cu-/LattePanda Module/HSIO_3_TX+-2_ConnectDirect" [IsNamedPolygon('F.Cu-/LattePanda Module/HSIO_3_TX+-2')] p354: connectstyle=Direct reliefconductorwidth=0.254 reliefentries=4 polygonreliefangle="90 Angle" airgapwidth=0.254
PolygonConnect Polygon_F.Cu-/HDMI/TMDS_D2--7_ConnectDirect [IsNamedPolygon('F.Cu-/HDMI/TMDS_D2--7')] p355: connectstyle=Direct reliefconductorwidth=0.254 reliefentries=4 polygonreliefangle="90 Angle" airgapwidth=0.254
PolygonConnect Polygon_F.Cu-+12V-9_ConnectDirect [IsNamedPolygon('F.Cu-+12V-9')] p356: connectstyle=Direct reliefconductorwidth=0.254 reliefentries=4 polygonreliefangle="90 Angle" airgapwidth=0.254
PolygonConnect Polygon_F.Cu-/PSU/PWR_C_D--7_ConnectDirect [IsNamedPolygon('F.Cu-/PSU/PWR_C_D--7')] p357: connectstyle=Direct reliefconductorwidth=0.254 reliefentries=4 polygonreliefangle="90 Angle" airgapwidth=0.254
PolygonConnect Polygon_F.Cu-GND-173_ConnectDirect [IsNamedPolygon('F.Cu-GND-173')] p358: connectstyle=Direct reliefconductorwidth=0.254 reliefentries=4 polygonreliefangle="90 Angle" airgapwidth=0.254
PolygonConnect Polygon_F.Cu-VDC-3_ConnectDirect [IsNamedPolygon('F.Cu-VDC-3')] p359: connectstyle=Direct reliefconductorwidth=0.254 reliefentries=4 polygonreliefangle="90 Angle" airgapwidth=0.254
PolygonConnect Polygon_F.Cu-Net-(U13-K)-3_ConnectDirect [IsNamedPolygon('F.Cu-Net-(U13-K)-3')] p360: connectstyle=Direct reliefconductorwidth=0.254 reliefentries=4 polygonreliefangle="90 Angle" airgapwidth=0.254
PolygonConnect Polygon_F.Cu-Net-(U6-ISOLATEB)-1_ConnectDirect [IsNamedPolygon('F.Cu-Net-(U6-ISOLATEB)-1')] p361: connectstyle=Direct reliefconductorwidth=0.254 reliefentries=4 polygonreliefangle="90 Angle" airgapwidth=0.254
PolygonConnect "Polygon_F.Cu-/LattePanda Module/REFCLK2+-1_ConnectDirect" [IsNamedPolygon('F.Cu-/LattePanda Module/REFCLK2+-1')] p362: connectstyle=Direct reliefconductorwidth=0.254 reliefentries=4 polygonreliefangle="90 Angle" airgapwidth=0.254
PolygonConnect Polygon_F.Cu-GND-172_ConnectDirect [IsNamedPolygon('F.Cu-GND-172')] p363: connectstyle=Direct reliefconductorwidth=0.254 reliefentries=4 polygonreliefangle="90 Angle" airgapwidth=0.254
PolygonConnect Polygon_F.Cu-Net-(U14-VDD)-2_ConnectDirect [IsNamedPolygon('F.Cu-Net-(U14-VDD)-2')] p364: connectstyle=Direct reliefconductorwidth=0.254 reliefentries=4 polygonreliefangle="90 Angle" airgapwidth=0.254
PolygonConnect Polygon_F.Cu-GND-171_ConnectDirect [IsNamedPolygon('F.Cu-GND-171')] p365: connectstyle=Direct reliefconductorwidth=0.254 reliefentries=4 polygonreliefangle="90 Angle" airgapwidth=0.254
PolygonConnect Polygon_F.Cu-+15V-4_ConnectDirect [IsNamedPolygon('F.Cu-+15V-4')] p366: connectstyle=Direct reliefconductorwidth=0.254 reliefentries=4 polygonreliefangle="90 Angle" airgapwidth=0.254
PolygonConnect Polygon_F.Cu-/USB2.0&USB3.0/CON_USB1_D_P-3_ConnectDirect [IsNamedPolygon('F.Cu-/USB2.0&USB3.0/CON_USB1_D_P-3')] p367: connectstyle=Direct reliefconductorwidth=0.254 reliefentries=4 polygonreliefangle="90 Angle" airgapwidth=0.254
PolygonConnect Polygon_F.Cu-/~{PLT_RST}-8_ConnectDirect [IsNamedPolygon('F.Cu-/~{PLT_RST}-8')] p368: connectstyle=Direct reliefconductorwidth=0.254 reliefentries=4 polygonreliefangle="90 Angle" airgapwidth=0.254
PolygonConnect Polygon_F.Cu-GND-170_ConnectDirect [IsNamedPolygon('F.Cu-GND-170')] p369: connectstyle=Direct reliefconductorwidth=0.254 reliefentries=4 polygonreliefangle="90 Angle" airgapwidth=0.254
PolygonConnect "Polygon_F.Cu-/LattePanda Module/HSIO_9_TX--2_ConnectDirect" [IsNamedPolygon('F.Cu-/LattePanda Module/HSIO_9_TX--2')] p370: connectstyle=Direct reliefconductorwidth=0.254 reliefentries=4 polygonreliefangle="90 Angle" airgapwidth=0.254
PolygonConnect "Polygon_F.Cu-/LattePanda Module/REFCLK2--2_ConnectDirect" [IsNamedPolygon('F.Cu-/LattePanda Module/REFCLK2--2')] p371: connectstyle=Direct reliefconductorwidth=0.254 reliefentries=4 polygonreliefangle="90 Angle" airgapwidth=0.254
PolygonConnect Polygon_F.Cu-GND-169_ConnectDirect [IsNamedPolygon('F.Cu-GND-169')] p372: connectstyle=Direct reliefconductorwidth=0.254 reliefentries=4 polygonreliefangle="90 Angle" airgapwidth=0.254
PolygonConnect Polygon_F.Cu-/HDMI/DDC_SCL-5_ConnectDirect [IsNamedPolygon('F.Cu-/HDMI/DDC_SCL-5')] p373: connectstyle=Direct reliefconductorwidth=0.254 reliefentries=4 polygonreliefangle="90 Angle" airgapwidth=0.254
PolygonConnect Polygon_F.Cu-+3V3-70_ConnectDirect [IsNamedPolygon('F.Cu-+3V3-70')] p374: connectstyle=Direct reliefconductorwidth=0.254 reliefentries=4 polygonreliefangle="90 Angle" airgapwidth=0.254
PolygonConnect "Polygon_F.Cu-/Gigabit Ethernet/MDI3+_ConnectDirect" [IsNamedPolygon('F.Cu-/Gigabit Ethernet/MDI3+')] p375: connectstyle=Direct reliefconductorwidth=0.254 reliefentries=4 polygonreliefangle="90 Angle" airgapwidth=0.254
PolygonConnect Polygon_F.Cu-/USB2.0&USB3.0/CON_USB3_SSRX_P-3_ConnectDirect [IsNamedPolygon('F.Cu-/USB2.0&USB3.0/CON_USB3_SSRX_P-3')] p376: connectstyle=Direct reliefconductorwidth=0.254 reliefentries=4 polygonreliefangle="90 Angle" airgapwidth=0.254
PolygonConnect Polygon_F.Cu-/HDMI/DDC_SDA-3_ConnectDirect [IsNamedPolygon('F.Cu-/HDMI/DDC_SDA-3')] p377: connectstyle=Direct reliefconductorwidth=0.254 reliefentries=4 polygonreliefangle="90 Angle" airgapwidth=0.254
PolygonConnect Polygon_F.Cu-/GPIO/SOC_UART2_TX-4_ConnectDirect [IsNamedPolygon('F.Cu-/GPIO/SOC_UART2_TX-4')] p378: connectstyle=Direct reliefconductorwidth=0.254 reliefentries=4 polygonreliefangle="90 Angle" airgapwidth=0.254
PolygonConnect Polygon_F.Cu-/USB2.0&USB3.0/CON_USB4_SSTX_N-4_ConnectDirect [IsNamedPolygon('F.Cu-/USB2.0&USB3.0/CON_USB4_SSTX_N-4')] p379: connectstyle=Direct reliefconductorwidth=0.254 reliefentries=4 polygonreliefangle="90 Angle" airgapwidth=0.254
PolygonConnect Polygon_F.Cu-/HDMI/TMDS_D1--6_ConnectDirect [IsNamedPolygon('F.Cu-/HDMI/TMDS_D1--6')] p380: connectstyle=Direct reliefconductorwidth=0.254 reliefentries=4 polygonreliefangle="90 Angle" airgapwidth=0.254
PolygonConnect "Polygon_F.Cu-/M.2 E&M Key/CON_PCIE_TX_1--1_ConnectDirect" [IsNamedPolygon('F.Cu-/M.2 E&M Key/CON_PCIE_TX_1--1')] p381: connectstyle=Direct reliefconductorwidth=0.254 reliefentries=4 polygonreliefangle="90 Angle" airgapwidth=0.254
PolygonConnect Polygon_F.Cu-+5V-12_ConnectDirect [IsNamedPolygon('F.Cu-+5V-12')] p382: connectstyle=Direct reliefconductorwidth=0.254 reliefentries=4 polygonreliefangle="90 Angle" airgapwidth=0.254
PolygonConnect Polygon_F.Cu-/HDMI/HPD-5_ConnectDirect [IsNamedPolygon('F.Cu-/HDMI/HPD-5')] p383: connectstyle=Direct reliefconductorwidth=0.254 reliefentries=4 polygonreliefangle="90 Angle" airgapwidth=0.254
PolygonConnect Polygon_F.Cu-GND-168_ConnectDirect [IsNamedPolygon('F.Cu-GND-168')] p384: connectstyle=Direct reliefconductorwidth=0.254 reliefentries=4 polygonreliefangle="90 Angle" airgapwidth=0.254
PolygonConnect Polygon_F.Cu-GND-167_ConnectDirect [IsNamedPolygon('F.Cu-GND-167')] p385: connectstyle=Direct reliefconductorwidth=0.254 reliefentries=4 polygonreliefangle="90 Angle" airgapwidth=0.254
PolygonConnect "Polygon_F.Cu-/LattePanda Module/USB_2_P7+-2_ConnectDirect" [IsNamedPolygon('F.Cu-/LattePanda Module/USB_2_P7+-2')] p386: connectstyle=Direct reliefconductorwidth=0.254 reliefentries=4 polygonreliefangle="90 Angle" airgapwidth=0.254
PolygonConnect Polygon_F.Cu-/HDMI/DDI_B_DDC_SCL-2_ConnectDirect [IsNamedPolygon('F.Cu-/HDMI/DDI_B_DDC_SCL-2')] p387: connectstyle=Direct reliefconductorwidth=0.254 reliefentries=4 polygonreliefangle="90 Angle" airgapwidth=0.254
PolygonConnect Polygon_F.Cu-GND-166_ConnectDirect [IsNamedPolygon('F.Cu-GND-166')] p388: connectstyle=Direct reliefconductorwidth=0.254 reliefentries=4 polygonreliefangle="90 Angle" airgapwidth=0.254
PolygonConnect Polygon_F.Cu-/USB2.0&USB3.0/CON_USB4_SSRX_N-3_ConnectDirect [IsNamedPolygon('F.Cu-/USB2.0&USB3.0/CON_USB4_SSRX_N-3')] p389: connectstyle=Direct reliefconductorwidth=0.254 reliefentries=4 polygonreliefangle="90 Angle" airgapwidth=0.254
PolygonConnect Polygon_F.Cu-/USB2.0&USB3.0/CON_USB3_SSTX_P-5_ConnectDirect [IsNamedPolygon('F.Cu-/USB2.0&USB3.0/CON_USB3_SSTX_P-5')] p390: connectstyle=Direct reliefconductorwidth=0.254 reliefentries=4 polygonreliefangle="90 Angle" airgapwidth=0.254
PolygonConnect Polygon_F.Cu-/USB2.0&USB3.0/CON_USB4_SSTX_N-3_ConnectDirect [IsNamedPolygon('F.Cu-/USB2.0&USB3.0/CON_USB4_SSTX_N-3')] p391: connectstyle=Direct reliefconductorwidth=0.254 reliefentries=4 polygonreliefangle="90 Angle" airgapwidth=0.254
PolygonConnect Polygon_F.Cu-GND-165_ConnectDirect [IsNamedPolygon('F.Cu-GND-165')] p392: connectstyle=Direct reliefconductorwidth=0.254 reliefentries=4 polygonreliefangle="90 Angle" airgapwidth=0.254
PolygonConnect Polygon_F.Cu-+3V3-69_ConnectDirect [IsNamedPolygon('F.Cu-+3V3-69')] p393: connectstyle=Direct reliefconductorwidth=0.254 reliefentries=4 polygonreliefangle="90 Angle" airgapwidth=0.254
PolygonConnect Polygon_F.Cu-/HDMI/TMDS_D1+-7_ConnectDirect [IsNamedPolygon('F.Cu-/HDMI/TMDS_D1+-7')] p394: connectstyle=Direct reliefconductorwidth=0.254 reliefentries=4 polygonreliefangle="90 Angle" airgapwidth=0.254
PolygonConnect Polygon_F.Cu-/GPIO/SOC_UART1_RX-3_ConnectDirect [IsNamedPolygon('F.Cu-/GPIO/SOC_UART1_RX-3')] p395: connectstyle=Direct reliefconductorwidth=0.254 reliefentries=4 polygonreliefangle="90 Angle" airgapwidth=0.254
PolygonConnect Polygon_F.Cu-/HDMI/TMDS_D2--6_ConnectDirect [IsNamedPolygon('F.Cu-/HDMI/TMDS_D2--6')] p396: connectstyle=Direct reliefconductorwidth=0.254 reliefentries=4 polygonreliefangle="90 Angle" airgapwidth=0.254
PolygonConnect "Polygon_F.Cu-/Gigabit Ethernet/HSI+-1_ConnectDirect" [IsNamedPolygon('F.Cu-/Gigabit Ethernet/HSI+-1')] p397: connectstyle=Direct reliefconductorwidth=0.254 reliefentries=4 polygonreliefangle="90 Angle" airgapwidth=0.254
PolygonConnect Polygon_F.Cu-+5V-11_ConnectDirect [IsNamedPolygon('F.Cu-+5V-11')] p398: connectstyle=Direct reliefconductorwidth=0.254 reliefentries=4 polygonreliefangle="90 Angle" airgapwidth=0.254
PolygonConnect Polygon_F.Cu-GND-164_ConnectDirect [IsNamedPolygon('F.Cu-GND-164')] p399: connectstyle=Direct reliefconductorwidth=0.254 reliefentries=4 polygonreliefangle="90 Angle" airgapwidth=0.254
PolygonConnect Polygon_F.Cu-GND-163_ConnectDirect [IsNamedPolygon('F.Cu-GND-163')] p400: connectstyle=Direct reliefconductorwidth=0.254 reliefentries=4 polygonreliefangle="90 Angle" airgapwidth=0.254
PolygonConnect Polygon_F.Cu-GND-162_ConnectDirect [IsNamedPolygon('F.Cu-GND-162')] p401: connectstyle=Direct reliefconductorwidth=0.254 reliefentries=4 polygonreliefangle="90 Angle" airgapwidth=0.254
PolygonConnect "Polygon_F.Cu-/LattePanda Module/HSIO_2_TX+-2_ConnectDirect" [IsNamedPolygon('F.Cu-/LattePanda Module/HSIO_2_TX+-2')] p402: connectstyle=Direct reliefconductorwidth=0.254 reliefentries=4 polygonreliefangle="90 Angle" airgapwidth=0.254
PolygonConnect Polygon_F.Cu-/GPIO/I2C2_SCL-4_ConnectDirect [IsNamedPolygon('F.Cu-/GPIO/I2C2_SCL-4')] p403: connectstyle=Direct reliefconductorwidth=0.254 reliefentries=4 polygonreliefangle="90 Angle" airgapwidth=0.254
PolygonConnect "Polygon_F.Cu-/LattePanda Module/REFCLK0--2_ConnectDirect" [IsNamedPolygon('F.Cu-/LattePanda Module/REFCLK0--2')] p404: connectstyle=Direct reliefconductorwidth=0.254 reliefentries=4 polygonreliefangle="90 Angle" airgapwidth=0.254
PolygonConnect "Polygon_F.Cu-/Gigabit Ethernet/GbE_PCIe_RX+-2_ConnectDirect" [IsNamedPolygon('F.Cu-/Gigabit Ethernet/GbE_PCIe_RX+-2')] p405: connectstyle=Direct reliefconductorwidth=0.254 reliefentries=4 polygonreliefangle="90 Angle" airgapwidth=0.254
PolygonConnect Polygon_F.Cu-/HDMI/DDI_B_HPD-4_ConnectDirect [IsNamedPolygon('F.Cu-/HDMI/DDI_B_HPD-4')] p406: connectstyle=Direct reliefconductorwidth=0.254 reliefentries=4 polygonreliefangle="90 Angle" airgapwidth=0.254
PolygonConnect Polygon_F.Cu-/GPIO/SOC_UART0_RX-3_ConnectDirect [IsNamedPolygon('F.Cu-/GPIO/SOC_UART0_RX-3')] p407: connectstyle=Direct reliefconductorwidth=0.254 reliefentries=4 polygonreliefangle="90 Angle" airgapwidth=0.254
PolygonConnect Polygon_F.Cu-/HDMI/DDI_B_HPD-3_ConnectDirect [IsNamedPolygon('F.Cu-/HDMI/DDI_B_HPD-3')] p408: connectstyle=Direct reliefconductorwidth=0.254 reliefentries=4 polygonreliefangle="90 Angle" airgapwidth=0.254
PolygonConnect Polygon_F.Cu-GND-161_ConnectDirect [IsNamedPolygon('F.Cu-GND-161')] p409: connectstyle=Direct reliefconductorwidth=0.254 reliefentries=4 polygonreliefangle="90 Angle" airgapwidth=0.254
PolygonConnect Polygon_F.Cu-GND-160_ConnectDirect [IsNamedPolygon('F.Cu-GND-160')] p410: connectstyle=Direct reliefconductorwidth=0.254 reliefentries=4 polygonreliefangle="90 Angle" airgapwidth=0.254
PolygonConnect Polygon_F.Cu-/HDMI/TMDS_D0+-6_ConnectDirect [IsNamedPolygon('F.Cu-/HDMI/TMDS_D0+-6')] p411: connectstyle=Direct reliefconductorwidth=0.254 reliefentries=4 polygonreliefangle="90 Angle" airgapwidth=0.254
PolygonConnect Polygon_F.Cu-GND-159_ConnectDirect [IsNamedPolygon('F.Cu-GND-159')] p412: connectstyle=Direct reliefconductorwidth=0.254 reliefentries=4 polygonreliefangle="90 Angle" airgapwidth=0.254
PolygonConnect Polygon_F.Cu-+12V-8_ConnectDirect [IsNamedPolygon('F.Cu-+12V-8')] p413: connectstyle=Direct reliefconductorwidth=0.254 reliefentries=4 polygonreliefangle="90 Angle" airgapwidth=0.254
PolygonConnect Polygon_F.Cu-GND-158_ConnectDirect [IsNamedPolygon('F.Cu-GND-158')] p414: connectstyle=Direct reliefconductorwidth=0.254 reliefentries=4 polygonreliefangle="90 Angle" airgapwidth=0.254
PolygonConnect Polygon_F.Cu-/Fan_Temp/FAN_1_PWM-1_ConnectDirect [IsNamedPolygon('F.Cu-/Fan_Temp/FAN_1_PWM-1')] p415: connectstyle=Direct reliefconductorwidth=0.254 reliefentries=4 polygonreliefangle="90 Angle" airgapwidth=0.254
PolygonConnect Polygon_F.Cu-/PSU/PWR_C_D--6_ConnectDirect [IsNamedPolygon('F.Cu-/PSU/PWR_C_D--6')] p416: connectstyle=Direct reliefconductorwidth=0.254 reliefentries=4 polygonreliefangle="90 Angle" airgapwidth=0.254
PolygonConnect "Polygon_F.Cu-/LattePanda Module/REFCLK3-_ConnectDirect" [IsNamedPolygon('F.Cu-/LattePanda Module/REFCLK3-')] p417: connectstyle=Direct reliefconductorwidth=0.254 reliefentries=4 polygonreliefangle="90 Angle" airgapwidth=0.254
PolygonConnect Polygon_F.Cu-GND-157_ConnectDirect [IsNamedPolygon('F.Cu-GND-157')] p418: connectstyle=Direct reliefconductorwidth=0.254 reliefentries=4 polygonreliefangle="90 Angle" airgapwidth=0.254
PolygonConnect Polygon_F.Cu-/HDMI/TMDS_D2+-7_ConnectDirect [IsNamedPolygon('F.Cu-/HDMI/TMDS_D2+-7')] p419: connectstyle=Direct reliefconductorwidth=0.254 reliefentries=4 polygonreliefangle="90 Angle" airgapwidth=0.254